# Altium PCB PCB_proc.PcbDoc
Units mm, origin at the board's own origin, x right, y up, seen from the top; angles counter-clockwise.
Board outline 100.96 x 101.6 mm, 2 copper layers (Top Layer, Bottom Layer); 70 components, 38 nets, 282 pads, 0 vias.
Unrouted connection lines stored in the file: 167.
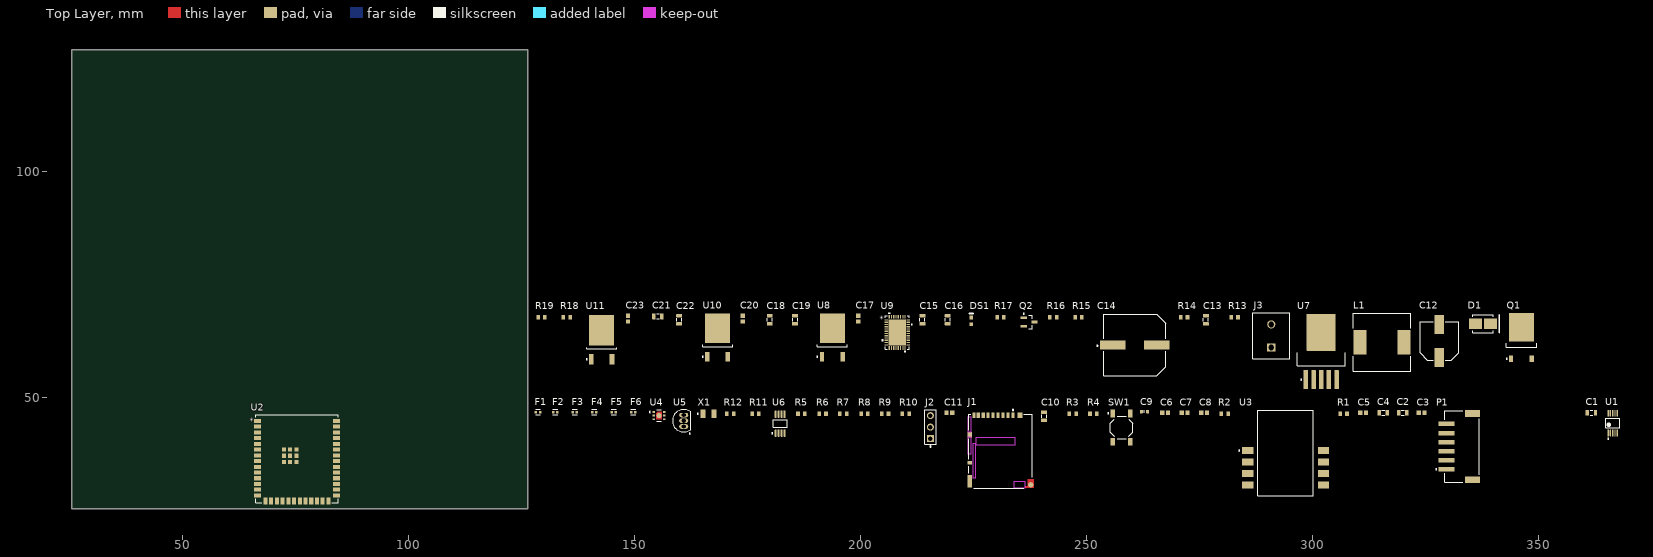
[diagram p0: Top Layer view]
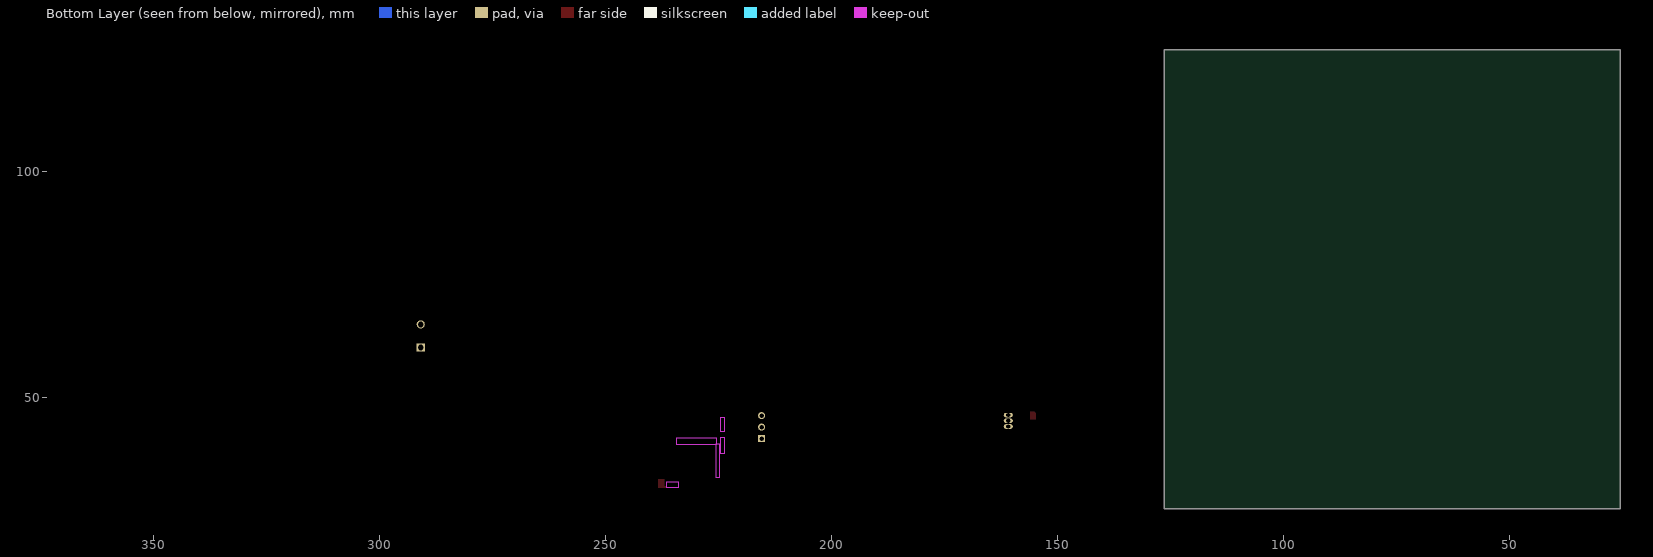
[diagram p1: Bottom Layer view, seen from below]

## Layer stack, top to bottom
Top Solder: solder mask 0.0102, Solder Resist, Dk 3.5
Top Layer: signal copper 0.0356
Dielectric 1: dielectric 0.32, FR-4, Dk 4.8
Bottom Layer: signal copper 0.0356
Bottom Solder: solder mask 0.0102, Solder Resist, Dk 3.5

## Board outline
25.4,25.4 126.365,25.4 126.365,127 25.4,127

## Design rules (kind name [scope] priority, off if disabled: settings)
Clearance [All] p1: gap=0.254 ignorepadtopadclearanceinfootprint=FALSE
PolygonConnect [All] p1: connectstyle=Relief reliefconductorwidth=0.254 reliefentries=4 polygonreliefangle="90 Angle" airgapwidth=0.254
RoomDefinition Supplies [InComponentClass('Supplies')] p1: confinementstyle=ConfineIn formatcopy=TRUE lockcomponents=FALSE outline 127.508,51.435 350.012,51.435 350.012,71.501 127.508,71.501
RoomDefinition Processor [InComponentClass('Processor')] p2: confinementstyle=ConfineIn formatcopy=TRUE lockcomponents=FALSE outline 127.508,26.797 368.554,26.797 368.554,50.165 127.508,50.165
RoutingVias [All] p1: holewidth=0.711 width=1.27 viastyle="Through Hole" minholewidth=0.711 minwidth=1.27 maxholewidth=0.711 maxwidth=1.27
SolderMaskExpansion [All] p1: expansion=0.102 istentingtop=FALSE
Width [All] p1: maxlimit=0.254 minlimit=0.254 preferedwidth=0.254
30 further rules are at their usual default settings.

## Classes and differential pairs
component class Supplies: C12 C13 C14 C15 C16 C17 C18 C19 C20 C21 C22 C23 D1 DS1 J3 L1 Q1 Q2 R13 R14 R15 R16 R17 R18 R19 U7 U8 U9 U10 U11
component class Processor: C1 C2 C3 C4 C5 C6 C7 C8 C9 C10 C11 F1 F2 F3 F4 F5 F6 J1 J2 P1 R1 R2 R3 R4 R5 R6 R7 R8 R9 R10 R11 R12 SW1 U1 U2 U3 U4 U5 U6 X1

## Components (designator, comment, footprint, x,y, rotation, side; value= is the part's Value field where it differs from the comment)
C1 "Capacitor 22µF +/-40% 16V 0805" CAPC0805(2012)145_L 361.823,46.609 r0 top value=22µF
C2 "Capacitor 22µF +/-40% 16V 0805" CAPC0805(2012)145_L 320.04,46.609 r0 top value=22µF
C3 "Capacitor 100 nF +/-10% 50 V 0603" CAPC1608X90X40NL10T20 324.231,46.609 r0 top value=100nF
C4 "Capacitor 22µF +/-40% 16V 0805" CAPC0805(2012)145_L 315.722,46.609 r0 top value=10µF
C5 "Capacitor 100 nF +/-10% 50 V 0603" CAPC1608X90X40NL10T20 311.277,46.609 r0 top value=100nF
C6 "Capacitor 100 nF +/-10% 50 V 0603" CAPC1608X90X40NL10T20 267.462,46.609 r0 top value=1uF
C7 "Capacitor 100 nF +/-10% 50 V 0603" CAPC1608X90X40NL10T20 271.78,46.609 r0 top value=10nF
C8 "Capacitor 100 nF +/-10% 50 V 0603" CAPC1608X90X40NL10T20 276.098,46.609 r0 top value=330nF
C9 "Capacitor 1µF +/-40% 50V 0603" CAPC0603(1608)100_L 262.89,46.863 r0 top value=1µF
C10 "Capacitor 22µF +/-40% 16V 0805" CAPC0805(2012)145_L 240.665,45.847 r90 top value=10µF
C11 "Capacitor 100 nF +/-10% 50 V 0603" CAPC1608X90X40NL10T20 219.71,46.609 r0 top value=100nF
C12 "EEE-FK1E221P" PNSC-EEE-FK1E221P_N 328.168,62.484 r90 top
C13 "Capacitor 22µF +/-40% 16V 0805" CAPC0805(2012)145_L 276.479,67.183 r90 top value=22µF
C14 "EEV-FK1V681Q" FP-FKH13-MFG 260.731,61.595 r0 top
C15 "Capacitor 22µF +/-40% 16V 0805" CAPC0805(2012)145_L 213.741,67.183 r90 top value=10µF
C16 "Capacitor 22µF +/-40% 16V 0805" CAPC0805(2012)145_L 219.329,67.183 r90 top value=10µF
C17 "Capacitor 100 nF +/-10% 50 V 0603" CAPC1608X90X40NL10T20 199.517,67.437 r90 top value=100nF
C18 "Capacitor 22µF +/-40% 16V 0805" CAPC0805(2012)145_L 179.959,67.183 r90 top value=10µF
C19 "Capacitor 22µF +/-40% 16V 0805" CAPC0805(2012)145_L 185.547,67.183 r90 top value=10µF
C20 "Capacitor 100 nF +/-10% 50 V 0603" CAPC1608X90X40NL10T20 173.99,67.437 r90 top value=100nF
C21 "Capacitor 22µF +/-40% 16V 0805" CAPC0805(2012)145_L 155.194,67.945 r0 top value=10µF
C22 "Capacitor 22µF +/-40% 16V 0805" CAPC0805(2012)145_L 159.893,67.183 r90 top value=10µF
C23 "Capacitor 100 nF +/-10% 50 V 0603" CAPC1608X90X40NL10T20 148.59,67.437 r90 top value=100nF
D1 "SS54B" JCET-SMB-2_M 337.82,66.294 r0 top
DS1 "LTW-C191TS5" LTST-LTW-C191TS5_V 224.536,66.929 r90 top
F1 "LESD8D3.3CAT5G" FP-ESDALC5-1BM2-MFG 128.651,46.736 r0 top
F2 "LESD8D3.3CAT5G" FP-ESDALC5-1BM2-MFG 132.461,46.736 r0 top
F3 "LESD8D3.3CAT5G" FP-ESDALC5-1BM2-MFG 136.779,46.736 r0 top
F4 "LESD8D3.3CAT5G" FP-ESDALC5-1BM2-MFG 141.097,46.736 r0 top
F5 "LESD8D3.3CAT5G" FP-ESDALC5-1BM2-MFG 145.415,46.736 r0 top
F6 "LESD8D3.3CAT5G" FP-ESDALC5-1BM2-MFG 149.733,46.736 r0 top
J1 "DM3AT-SF-PEJM5" FP-DM3AT-SF-PEJM5-MFG 231.013,38.1 r0 top
J2 "90120-0123" FP-90120-0123-MFG 215.519,43.434 r90 top
J3 "1729128" PHOE-1729128-2_V 290.957,63.627 r90 top
L1 "SRR1280-330M" FP-SRR1280-MFG 315.468,62.23 r0 top
P1 "S6B-PH-SM4-TB(LF)(SN)" JST-S6B-PH-SM4-TB(LF)(SN)_V 332.613,39.116 r90 top
Q1 "IPD068P03L3 G" INF-PG-TO252-3-1_L 346.329,63.246 r90 top
Q2 "2N7002" INF-PG-SOT23_M 237.363,66.675 r0 top
R1 "Resistor 10k +/-1% 0603 100 mW" RESC1608X55X25ML10T15 306.959,46.355 r0 top value=10k
R2 "Resistor 10k +/-1% 0603 100 mW" RESC1608X55X25ML10T15 280.67,46.355 r0 top value=10k
R3 "Resistor 10k +/-1% 0603 100 mW" RESC1608X55X25ML10T15 247.015,46.355 r0 top value=10k
R4 "Resistor 10k +/-1% 0603 100 mW" RESC1608X55X25ML10T15 251.587,46.355 r0 top value=10k
R5 "Resistor 10k +/-1% 0603 100 mW" RESC1608X55X25ML10T15 186.944,46.355 r0 top value=10k
R6 "Resistor 10k +/-1% 0603 100 mW" RESC1608X55X25ML10T15 191.643,46.355 r0 top value=10k
R7 "Resistor 10k +/-1% 0603 100 mW" RESC1608X55X25ML10T15 196.215,46.355 r0 top value=10k
R8 "Resistor 10k +/-1% 0603 100 mW" RESC1608X55X25ML10T15 200.914,46.355 r0 top value=10k
R9 "Resistor 10k +/-1% 0603 100 mW" RESC1608X55X25ML10T15 205.486,46.355 r0 top value=10k
R10 "Resistor 10k +/-1% 0603 100 mW" RESC1608X55X25ML10T15 210.058,46.355 r0 top value=10k
R11 "Resistor 10k +/-1% 0603 100 mW" RESC1608X55X25ML10T15 176.784,46.355 r0 top value=0
R12 "Resistor 10k +/-1% 0603 100 mW" RESC1608X55X25ML10T15 171.196,46.355 r0 top value=0
R13 "Resistor 10k +/-1% 0603 100 mW" RESC1608X55X25ML10T15 282.829,67.691 r0 top value=10k
R14 "Resistor 10k +/-1% 0603 100 mW" RESC1608X55X25ML10T15 271.653,67.691 r0 top value=10k
R15 "Resistor 10k +/-1% 0603 100 mW" RESC1608X55X25ML10T15 248.285,67.691 r0 top value=47
R16 "Resistor 10k +/-1% 0603 100 mW" RESC1608X55X25ML10T15 242.697,67.691 r0 top value=47
R17 "Resistor 10k +/-1% 0603 100 mW" RESC1608X55X25ML10T15 231.013,67.691 r0 top value=10k
R18 "Resistor 10k +/-1% 0603 100 mW" RESC1608X55X25ML10T15 135.001,67.691 r0 top value=120
R19 "Resistor 10k +/-1% 0603 100 mW" RESC1608X55X25ML10T15 129.413,67.691 r0 top value=169
SW1 "TL3342F160QG" ESWI-TL3342F160QG_V 257.81,43.307 r0 top
U1 "ADS1015IDGST" FP-DGS0010A-MFG 366.522,44.323 r90 top
U2 "ESP32-S3-WROOM-1U-N8R2" ESP32­S3­WROOM­1U_EXP 75.286,36.396 r0 top
U3 "MP3V5004DP" Freescale_Semiconductor_SOT1693-1_MFG 294.132,34.417 r0 top
U4 "SGP40-D-R4" FP-SGP40-D-R4-MFG 155.448,45.974 r0 top
U5 "DS18B20+" Q3+1 160.909,44.831 r0 top
U6 "DS1338U-18" U8-1_N 182.245,44.196 r90 top
U7 "LM2576S-12/NOPB" KTT0005B_N 302.006,60.198 r90 top
U8 "LD1117DT50CTR" TO-252_N 193.802,63.246 r90 top
U9 "DRV8316CTRGFR" VQFN40_RGF_TEX 208.153,64.389 r0 top
U10 "LD1117DT33TR" TO-252_N 168.402,63.246 r90 top
U11 "LD1117DTC-R" TO-252_M 142.748,62.738 r90 top
X1 "ABS07-32.768KHz-T" ABRA-ABS07-2_V 166.37,46.355 r0 top

## Footprints (in the part's own frame and the unit in brackets; to place one, negate y for a bottom-side part, rotate by r counter-clockwise, add the part's x,y. Pads: shape width x height; smd on the part's side, far side on the other; paste and mask are expansions set on the pad)
ABRA-ABS07-2_V [mm] "SMD, 2-Leads, Body 3.2x1.5mm"
  rect 1.1x1.9 smd: 1(-1.25,0) 2(1.25,0)
  silkscreen extent -2.47,-0.12 -2.22,0.12, body extent -1.6,-0.75 1.6,0.75, height 0.9
CAPC0603(1608)100_L [mm] "Chip Capacitor, Body 1.6x0.8mm, Height 1.0mm, IPC High Density"
  rrect25% 0.66x0.76 smd: 1(-0.7,0) 2(0.7,0)
  silkscreen extent 0,-0.3 0,0.3, body extent -0.8,-0.4 0.8,0.4, height 0.95
CAPC0805(2012)145_L [mm] "Chip Capacitor, Body 2.0x1.2mm, Height 1.45mm, IPC High Density"
  rrect25% 0.76x1.3 smd: 1(-0.9,0) 2(0.89,0)
  silkscreen extent -0.3,-0.55 0.3,0.55, body extent -1,-0.6 1,0.6, height 1.45
CAPC1608X90X40NL10T20 [mm] "Chip Capacitor, 2-Leads, Body 1.70x0.90mm, IPC Medium Density"
  rect 0.95x0.95 smd: 1(-0.625,0) 2(0.625,0)
  body extent -0.85,-0.45 0.85,0.45, height 0.9
ESP32­S3­WROOM­1U_EXP [mil]
  rect 59x35 smd paste+0 mask+0: 1(-344.5,331.1) 2(-344.5,281.1) 3(-344.5,231.1) 4(-344.5,181.1) 5(-344.5,131.1) 6(-344.5,81.1) 7(-344.5,31.1) 8(-344.5,-18.9) 9(-344.5,-68.9) 10(-344.5,-118.9) 11(-344.5,-168.9) 12(-344.5,-218.9) 13(-344.5,-268.9) 14(-344.5,-318.9) 27(344.5,-318.9) 28(344.5,-268.9) 29(344.5,-218.9) 30(344.5,-168.9) 31(344.5,-118.9) 32(344.5,-68.9) 33(344.5,-18.9) 34(344.5,31.1) 35(344.5,81.1) 36(344.5,131.1) 37(344.5,181.1) 38(344.5,231.1) 39(344.5,281.1) 40(344.5,331.1)
  rect 35x59 smd paste+0 mask+0: 15(-275,-368.1) 16(-225,-368.1) 17(-175,-368.1) 18(-125,-368.1) 19(-75,-368.1) 20(-25,-368.1) 21(25,-368.1) 22(75,-368.1) 23(125,-368.1) 24(175,-368.1) 25(225,-368.1) 26(275,-368.1)
  rect 35x35 smd paste+0 mask+0: 41(-59.1,27.2) 42(-59.1,82.3) 43(-114.2,82.3) 44(-114.2,27.2) 45(-114.2,-27.9) 46(-59.1,-27.9) 47(-4,-27.9) 48(-4,27.2) 49(-4,82.3)
  silkscreen extent -360,-383 360,383
ESWI-TL3342F160QG_V [mm] "SMD, 4-Leads, Body 5x5mm, Pitch 6.3mm"
  rect 1x1.7 smd: 1(-1.9,3.15) 2(-1.9,-3.15) 3(1.9,3.15) 4(1.9,-3.15)
  silkscreen extent -3.07,-2.5 2.5,3.27, body extent -2.5,-2.5 2.5,2.5, height 1.5
FP-90120-0123-MFG [mm]
  rect 1.55x1.55 hole 1 paste-2539.97 mask+0: 1(-2.54,0)
  round 1.55 hole 1 paste-2539.97 mask+0: 2(0,0) 3(2.54,0)
  silkscreen extent -4.42,-1.27 3.81,1.27, body extent -3.91,-1.37 3.91,1.37, height 0.25
FP-DGS0010A-MFG [mm]
  rrect33% 1.45x0.3 smd paste+0 mask+0: 1(-2.2,1) 2(-2.2,0.5) 3(-2.2,0) 4(-2.2,-0.5) 5(-2.2,-1) 6(2.2,-1) 7(2.2,-0.5) 8(2.2,0) 9(2.2,0.5) 10(2.2,1)
  silkscreen extent -3.6,-1.55 1.05,1.55, body extent -3.03,-1.8 3.03,1.8, height 0.25
FP-DM3AT-SF-PEJM5-MFG [mm]
  rect 0.7x1.2 smd paste+0 mask+0: 1(2.775,7.975) 2(1.675,7.975) 3(0.575,7.975) 4(-0.525,7.975) 5(-1.625,7.975) 6(-2.725,7.975) 7(-3.825,7.975) 8(-4.925,7.975) 9(-5.875,7.975)
  rect 1x0.8 smd paste+0 mask+0: 10(-6.825,-2.525)
  rect 1x1.2 smd paste+0 mask+0: 11(4.325,7.975) 12(-6.825,3.675)
  rect 1x2.8 smd paste+0 mask+0: 13(-6.825,-6.675)
  round 1.145 smd paste+0 mask+0: 14(6.689,-7.439)
  Top Layer region: 6.025,-6.175 7.325,-6.175 7.325,-8.075 5.475,-8.075 5.475,-7.725 5.875,-7.725 6.025,-7.575 6.025,-6.175
  Keep-Out Layer region: 2.925,-8.075 5.475,-8.075 5.475,-6.725 2.925,-6.725
  Keep-Out Layer region: -7.225,-0.525 -6.475,-0.525 -6.475,3.075 -7.225,3.075
  Keep-Out Layer region: -7.225,4.275 -6.475,4.275 -6.475,7.525 -7.225,7.525
  Keep-Out Layer region: -6.125,-5.925 -5.425,-5.925 -5.425,1.675 -6.125,1.675
  Keep-Out Layer region: -5.425,1.375 3.275,1.375 3.275,2.975 -5.425,2.975
  silkscreen extent -7.02,-8.18 7.02,9.25, body extent -7.42,-8.27 7.42,8.67, height 0.25
FP-ESDALC5-1BM2-MFG [mm]
  rect 0.55x0.5 smd paste+0 mask+0: 1(-0.475,0) 2(0.475,0)
  silkscreen extent -0.53,-0.63 0.53,0.63, body extent -0.85,-0.43 0.85,0.43, height 0.25
FP-FKH13-MFG [mm]
  rect 5.7x2 smd paste+0 mask+0: 1(-4.85,0) 2(4.85,0)
  silkscreen extent -8.37,-6.85 6.85,6.85, body extent -7.95,-7.1 7.95,7.1, height 0.25
FP-SGP40-D-R4-MFG [mm]
  rect 0.55x0.4 smd paste+0 mask+0: 1(-1.15,0.8) 2(-1.15,0) 3(-1.15,-0.8) 4(1.15,-0.8) 5(1.15,0) 6(1.15,0.8)
  round 1.125 smd paste-1000 mask+0: 7(0,0)
  Top Layer region: -0.625,-0.85 0.625,-0.85 0.625,0.85 -0.325,0.85 -0.625,0.55 -0.625,-0.85
  silkscreen extent -2.17,-1.27 0.5,1.27, body extent -1.53,-1.37 1.53,1.37, height 0.25
FP-SRR1280-MFG [mm]
  rect 2.9x5.4 smd paste+0 mask+0: 1(-4.85,0) 2(4.85,0)
  silkscreen extent -6.4,-6.4 6.4,6.4, body extent -6.5,-6.5 6.5,6.5, height 0.25
Freescale_Semiconductor_SOT1693-1_MFG [mil]
  rect 100x60 smd paste+0 mask+0: 1(-330,150) 2(-330,50) 3(-330,-50) 4(-330,-150) 5(330,-150) 6(330,-50) 7(330,50) 8(330,150)
  silkscreen extent -410,-242 242,502, body extent -384,-252 384,506, height 10
INF-PG-SOT23_M [mm] "SOT23, 3-Leads, Body 2.9x1.3mm, Pitch 0.95mm, IPC Low Density"
  rect 1.35x0.6 smd: 1(-1.2,0.95) 2(-1.2,-0.95) 3(1.2,0)
  silkscreen extent -1.32,-1.5 0.7,1.92, body extent -0.7,-1.5 0.7,1.5, height 1.1
INF-PG-TO252-3-1_L [mm] "DPAK, 3-Leads, Body 6.525x6.12mm, Pitch 2.28mm, IPC High Density"
  rect 1.45x0.9 smd: 1(-4.7,2.28) 3(-4.7,-2.28)
  rect 6.3x5.55 smd: 2(2.3,0)
  silkscreen extent -4.82,-3.35 -1.25,3.4, body extent -2.15,-3.32 4.07,3.32, height 2.35
JCET-SMB-2_M [mm] "Molded Diode, 2-Leads, Body 4.57x3.94mm"
  rect 2.85x2.25 smd: 1(-1.675,0) 2(1.675,0)
  silkscreen extent -2.3,-2 3.6,2, body extent -2.5,-1.97 2.5,1.97, height 2.44
JST-S6B-PH-SM4-TB(LF)(SN)_V [mm] "SMD, 2-Leads, Body 15.9x7.6mm, Pitch 2mm"
  rect 1x3.5 smd: 1(-5,2.875) 2(-3,2.875) 3(-1,2.875) 4(1,2.875) 5(3,2.875) 6(5,2.875)
  rect 1.5x3.4 smd: MP1(-7.35,-2.875) MP2(7.35,-2.875)
  silkscreen extent -7.95,-4.37 7.95,5.3, body extent -7.95,-4.37 7.95,4.23, height 5.6
KTT0005B_N [mm] "DPAK, 5-Leads, Body 10.65x9.65mm, Pitch 1.7mm, IPC Medium Density"
  rrect10% 4.15x1 smd: 1(-6.25,3.4) 2(-6.25,1.7) 3(-6.25,0) 4(-6.25,-1.7) 5(-6.25,-3.4)
  rrect2% 8.2x6.4 smd: 6(4.2,0)
  silkscreen extent -6.37,-5.35 -0.3,5.35, body extent -3.15,-5.32 6.5,5.33, height 4.83
LTST-LTW-C191TS5_V [mm] "SMD, 2-Leads, Body 1.6x0.8mm"
  rect 0.8x0.8 smd: 1(-0.75,0) 2(0.75,0)
  silkscreen extent 1.65,-0.4 1.65,0.4, body extent -0.8,-0.4 0.8,0.4, height 0.65
PHOE-1729128-2_V [mm] "Receptacle, 2-Leads, Body 8.1x10.16mm, Pitch 5.08mm"
  rect 1.8x1.8 hole 1.3: 1(-2.54,0)
  round 1.8 hole 1.3: 2(2.54,0)
  silkscreen extent -5.08,-4.05 5.08,4.05, body extent -5.65,-4.05 5.08,4.05, height 10.01
PNSC-EEE-FK1E221P_N [mm] "CAPAE, 2-Leads, Body 8.5x8.5mm, IPC Medium Density"
  rect 4.2x2.1 smd: 1(-3.675,0) 2(3.675,0)
  silkscreen extent -4.25,-4.25 4.25,4.25, body extent -5,-4.25 5,4.25, height 10.5
Q3+1 [mm] "TO, Flat Index; 3 In-Line, Axial Leads; Body Dia. 4.7mm; Leads 0.56 x 0.51 mm (max)"
  oval 2x1 hole 0.9: 1(0,-1.27) 2(0,0) 3(0,1.27)
  silkscreen extent -2.48,-2.95 1.5,2.48, body extent -2.48,-2.5 1.5,2.5, height 4.96
RESC1608X55X25ML10T15 [mm] "Chip Resistor, 2-Leads, Body 1.70x0.90mm, IPC Low Density"
  rect 0.8x1 smd: 1(-0.75,0) 2(0.75,0)
  body extent -0.85,-0.45 0.85,0.45, height 0.55
TO-252_M [mm] "D-PAK, 4-Leads, Body 6.1x6.5mm, Pitch 2.28mm, Lead Span 9.7mm, IPC Low Density"
  rect 2.4x1 smd: 1(-4.3,2.28) 3(-4.3,-2.28)
  rect 6.8x5.55 smd: 4(2.1,0)
  silkscreen extent -4.42,-3.3 -1.7,3.45, body extent -1.95,-3.3 4.25,3.3, height 2.4
TO-252_N [mm] "D-PAK, 4-Leads, Body 6.1x6.5mm, Pitch 2.28mm, Lead Span 9.7mm, IPC Medium Density"
  rect 2.1x0.95 smd: 1(-4.25,2.28) 3(-4.25,-2.28)
  rect 6.5x5.5 smd: 4(2.05,0)
  silkscreen extent -4.37,-3.3 -1.6,3.43, body extent -2,-3.3 4.2,3.3, height 2.4
U8-1_N [mm] "TSOP, 8-Leads, Body 3x3mm, Pitch 0.65mm, IPC Medium Density"
  oval 1.7x0.45 smd: 1(-2.1,0.975) 2(-2.1,0.325) 3(-2.1,-0.325) 4(-2.1,-0.975) 5(2.1,-0.975) 6(2.1,-0.325) 7(2.1,0.325) 8(2.1,0.975)
  silkscreen extent -2.22,-1.55 0.85,1.87, body extent -1.55,-1.55 1.55,1.55, height 1.1
VQFN40_RGF_TEX [mil]
  rect 32x10 smd paste+0 mask+0: 1(-96.5,108.3) 2(-96.5,88.61) 3(-96.5,68.91) 4(-96.5,49.22) 5(-96.5,29.53) 6(-96.5,9.84) 7(-96.5,-9.84) 8(-96.5,-29.53) 9(-96.5,-49.22) 10(-96.5,-68.91) 11(-96.5,-88.61) 12(-96.5,-108.3) 21(96.5,-108.3) 22(96.5,-88.61) 23(96.5,-68.91) 24(96.5,-49.22) 25(96.5,-29.53) 26(96.5,-9.84) 27(96.5,9.84) 28(96.5,29.53) 29(96.5,49.22) 30(96.5,68.91) 31(96.5,88.61) 32(96.5,108.3)
  rect 10x32 smd paste+0 mask+0: 13(-68.91,-136) 14(-49.23,-136) 15(-29.53,-136) 16(-9.85,-136) 17(9.84,-136) 18(29.53,-136) 19(49.23,-136) 20(68.92,-136) 33(68.92,136) 34(49.23,136) 35(29.53,136) 36(9.84,136) 37(-9.85,136) 38(-29.53,136) 39(-49.23,136) 40(-68.91,136)
  rect 150x228 smd paste-113.5 mask+0: 41(0,0)
  silkscreen extent -132,-172 132,172, body extent -101,-140 101,140, height 39

## Part data
C1 C2 C4 C10 C13 C15 C16 C18 C19 C21 C22: library part CMP-001-00081-4, "Chip Capacitor, 22µF +/-40%, 16V, 0805, Thickness 1.45 mm", Case/Package=0805, Max Operating Temperature=85°C, Min Operating Temperature=-55°C, Tolerance=5%, Voltage Rating=16V, Mounting Technology=SMT, Pins=2
C3 C5 C6 C7 C8 C11 C17 C20 C23: library part CMP-001-00017-6, "Chip Capacitor, 100 nF, +/- 10%, 50 V, 0603 (1608 Metric)", Capacitor Type=Ceramic, Case/Package=0603, Max Operating Temperature=125°C, Min Operating Temperature=-55°C, Tolerance=10%, Voltage Rating=50V, Mounting Technology=SM, Pins=2, RoHS Compliant=True
C9: library part CMP-001-00078-4, "Chip Capacitor, 1µF +/-40%, 50V, 0603, Thickness 1 mm", Case/Package=0603, Max Operating Temperature=85°C, Min Operating Temperature=-55°C, Tolerance=10%, Voltage Rating=50V, Mounting Technology=SMT, Pins=2
C12: library part CMP-1665-00017-3, "Aluminum Electrolytic Capacitor, 220 uF, +/- 20%, 25 V, -55 to 105 degC, 2-Pin CAPAE, RoHS, Tape and Reel", Manufacturer=Panasonic, Max Operating Temperature="105 degC", Min Operating Temperature="-55 degC", Package Quantity=500, Voltage Rating="25 V", ComponentLink1Description="Manufacturer URL", ComponentLink1URL=http://www.panasonic.com/, ComponentLink2Description=Datasheet, ComponentLink2URL=http://industrial.panasonic.com/cdbs/www-data/pdf/RDE0000/ABA0000C1181.pdf, DatasheetVersion=03/2016, Height="10.2 mm", Lead Pitch="3.1 mm", Length="10.2 mm", Mount="Surface Mount", Mounting Technology="Surface Mount", PackageDescription="2-Pin Electrolytic Aluminum Capacitor, Body 8.3 x 8.3 mm", PackageReference=EEE-FK1E221P, Packaging="Tape and Reel", Pins=2, REACH SVHC="No SVHC", RoHSCompliant=true
C14: library part CMP-05427-002172-1, "CAP ALUM 680UF 20% 35V SMD", Capacitance=680uF, Case/Package=Radial, ESR (Equivalent Series Resistance)=60mR, Leakage Current=3uA, Max Operating Temperature=105°C, Min Operating Temperature=-55°C, Package Quantity=200, Ratings=AEC-Q200, Ripple Current=1.1A, Tolerance=20%, Voltage=35V, Construction=Cylindrical, Contact Plating=Tin, Diameter=12.5mm, Height=13.5mm, Height - Seated (Max)=0.531inch, Impedance=60mR, Lead Free="Lead Free", Length=14mm, Life (Hours)=5000Hour, Material=Aluminium, Mount="Surface Mount", Packaging="Tape and Reel", Radiation Hardening=No, Reach SVHC Compliant=Yes, Ripple Current (AC)=1.1A, RoHS Compliant=Yes, Series=FK, Termination=SMD/SMT, Voltage Rating=35V, Voltage Rating (DC)=35V, Width=900um
D1: library part CMP-2100-03685-1, "Schottky Barrier Rectifier, 40 V, 5 A, -55 to 150 degC, 2-Pin SMD", Manufacturer=JCET, Package Description="2-Pin Surface Mount Device, Body 4.315 x 3.62 mm", Package Reference=SMB-2, Datasheet URL=http://wiki.seeedstudio.com/images/3/3f/0310130P1.pdf, Datasheet Version=41395.0, Manufacturer URL=http://www.cj-elec.com/
DS1: library part CMP-007-00027-2, "LED Uni-Color White, 70 mW, 20 mA, -20 to 80 degC, 2-Pin SMD, RoHS, Tape and Reel", Case/Package=0603, Colour=White, Forward Current=5mA, Forward Voltage=3.15V, Manufacturer=Lite-On, Max Operating Temperature=80°C, Min Operating Temperature=-20°C, Package Description="2-Pin Surface Mount Device, Body 1.6 x 0.8 mm", Package Quantity=1, Power=70mW, Datasheet URL=http://optoelectronics.liteon.com/upload/download/DS22-2004-201/S_110_LTW-C191TS5.pdf, Datasheet Version="Rev. B, 06/2010", Illumination Colour=White, Lens Style=Diffused, Luminous Intensity=28mcd, Manufacturer URL=http://www.us.liteon.com/, Mounting Technology=SM, Nominal Vf=2.93V, Package Reference=LTW-C191TS5, Packaging=TapeandReel, Pins=2, RoHS Compliant=True, Viewing Angle=130degrees
F1 F2 F3 F4 F5 F6: library part CMP-00355-46355615-1, "ESDALC5-1BM2 ESD Suppressors / TVS Diodes Single Line Transil Vbr 5V min 26pF 0", Breakdown Voltage=5V, Capacitance=26pF, Clamping Voltage=17.5V, Leakage Current=50nA, Max Breakdown Voltage=8V, Max Operating Temperature=150°C, Max Power Dissipation=150W, Max Reverse Leakage Current=60nA, Min Operating Temperature=-55°C, Peak Pulse Current=9A, Power Line Protection=No, Composition=Zener, Depth=600µm, Direction=Bidirectional, Element Configuration=Single, ESD Protection=Yes, Height=450µm, Lead Free="Lead Free", Length=1mm, Lifecycle Status=Production, Max Repetitive Reverse Voltage (Vrrm)=5V, Min Breakdown Voltage=5V, Mount="Surface Mount", NexarPartId=46355615, Number of Bidirectional Channels=1, Number of Channels=1, Number of Pins=2, Packaging="Tape and Reel", Peak Pulse Power=150W, Polarity=Bidirectional, Radiation Hardening=No, REACH SVHC="No SVHC", Reverse Standoff Voltage=5V, RoHS=Compliant, Schedule B="8536300000, 8536300000", Termination=SMD/SMT, Width=650µm
J1: library part CMP-2000-05150-2, "CONN MICRO SD CARD PUSH-PUSH R/A", Current Rating=500mA, Flammability Rating="UL94 V-0", Max Operating Temperature=85°C, Max Voltage Rating (AC)=125V, Min Operating Temperature=-25°C, Package Quantity=1, Connector Type=Connector, Contact Material="Copper Alloy", Contact Plating=Gold, Depth=15.95mm, Gender=Female, Height=1.68mm, Housing Material=Polymer, Lead Free="Lead Free", Length=15.95mm, Max Current Rating=500mA, Mount="Surface Mount", Number of Contacts=8, Number of Positions=8, Number of Rows=1, Orientation="Right Angle", Packaging="Tape and Reel", Pitch=1.1mm, Radiation Hardening=No, REACH SVHC="No SVHC", Termination=SMD/SMT, Voltage Rating=125V, Width=13.85mm
J2: library part CMP-04776-000237-1, "CONN HEADER VERT 3POS 2.54MM", Color=Black, Contact Resistance=20mR, Current Rating=3A, Max Operating Temperature=125°C, Max Voltage Rating (DC)=350.35kV, Min Operating Temperature=-55°C, Voltage Rating=350V, Contact Gender=Male, Contact Material=Brass, Contact Mating Length=6.75mm, Contact Plating=Tin, Contact Post Length=2.9mm, Gender=Male, Glow Wire Compliant=Non-compliant, Housing Color=Black, Housing Material=Polyester, Lead Free="Lead Free", Mount="Through Hole", Number of Circuits=3, Number of Contacts=3, Number of Positions=3, Number of Rows=1, Orientation=Vertical, Packaging=Tray, Pitch=2.54mm, Radiation Hardening=No, REACH SVHC="No SVHC", RoHS Compliant=Yes, Series=90120, Termination=Solder, Voltage Rating (AC)=350V
J3: library part CMP-2000-05815-1, "PCB Terminal Block, 13.5 A, 400 V, 2-Pin THD, RoHS, Bulk", Current Rating=13500mA, Manufacturer="Phoenix Contact", Package Description="2-Pin Through Hole Device, Body 8.1 x 10.16 mm, Pitch 5.08 mm", Package Reference=1729128-2, Package Version=03/2015, Voltage Rating=400V, Datasheet URL=https://datasheet.ciiva.com/16046/1729128-16046181.pdf, Datasheet Version=12/2013, Manufacturer URL=http://www.phoenixcontact.com/, Mounting Technology=ThroughHole, No. of Positions=2, No. of Rows=1, Orientation=Horizontal, Package URL=https://www.phoenixcontact.com/online/portal/pi/pxc/product_detail_page/!ut/p/b1/3VdJjqNKFDxLH8AFycySyWY2ozFsEPOMMQaDOX1XedGL_1Vdm5YXJleknhSKeBkvI6EA8ncAo3AYoDhBQGco6KN7VURTdemj9us_IEKEZo_YHiPAEWEFmDGOHMORkqKYCORBZxgL7ZoaZYcbFFUZ3fqxSY6GOuxydWUuHqz1ynmMFygu583Bob0Ewr6Sd_l-5m-kAueHiB0jpRwZwe58wwtkpxtMYd_LmGcDRU02dRNEyWt6Y2ti5pSyJ_reIkzIulrqApdnbT11V5jnCKbYNCvhEM1MCpPByat_X379-iThf08CI5GfOPqfBeS3BRoBOdD55AKVv0iLwCMq-2BrzXWSGRH7pUGD9uwXQjiph3xL0DKQwdGa0JImiIOmBNOestqgwTHSSs2oOep-78apyXQBvNi8ZLaFjvjWvcaUEBu0MC6Wbe-d6mB0FAebo2lUWinqYaZs5DAYzV0RP9yitUjnGJ0iI9xhZkT42OCQNUJJhkgWINNQLP2JFP6OpMg3JCVg70jqHT0lvKOnhHf0lPuOnnLf0VPuWx6_dxwUIvwk5WMkT0kLL1mh61l2yZVSzG3pYV_bqo-mj6uMKwKwdnnW8Jh5RTOJzMOA5c-eJDaZQw4mTMPH02PvS_ZAqNVjVTo2WyYLkwH_KU1mmmG5kjRhDqPXLwwVHvVOjCM60-fpXvTDfMGW1PVFVS1r4e4yVDk4ZdNbkUHvqPqQSeian4UD39fNKmachqdJ1NJbyk8rXT9mXTvPk3oE5meulKGgiruPJek-4I9hTT6G8ZLOyRSm2RRVbThERQad5OS28hdt4YW4vG0stgYYzsWsK4_7y6DZMjJSCqri1kyiZR5vD7pwIrNR7QwPHTcLTI5qT7eRlpHrdGiupYlqQDJ7zy_CND8fWWBoLRXxk1RVcXiBQwbTD4Xi7KL-FuO94t9xaqweXzH, Packing=Bulk, PartNumber=1729128, Pitch=5.08mm, RoHS=TRUE
L1: library part CMP-2000-07148-2, "FIXED IND 33UH 3.5A 57 MOHM SMD", Case/Package=Nonstandard, Current Rating=3.5A, DC Resistance (DCR)=57mR, Frequency=9.5MHz, Inductance=33uH, Inductance Tolerance=20%, Max Operating Temperature=125°C, Min Operating Temperature=-40°C, Package Quantity=400, Resistance=57MR, Resistor Type=Wirewound, Saturation Current=3.3A, Test Frequency=100kHz, Core Material=Ferrite, DC Current=3.5A, Depth=12.8mm, Height=7.5mm, Height - Seated (Max)=0.315inch, Length=12.5mm, Material=Steel, Max DC Current=3.5A, Military Standard=Not, Mount="Surface Mount", Number of Pins=2, Packaging="Tape and Reel", Q Factor=28, Radiation Hardening=No, REACH SVHC="No SVHC", RMS Current (Irms)=3.5A, RoHS Compliant=Yes, Sample Rate (Hz)=100kHz, Self Resonant Frequency=9.5MHz, Series=SRR1280, Shielding=Shielded, Termination=SMD/SMT, Tolerance=20%, Width=12.5mm
P1: library part CMP-2000-07027-1, "Male Header, Pitch 2 mm, 1 x 6 Position, Height 5.5 mm, -25 to 85 degC", Manufacturer=JST, Package Description="Male Header, Pitch 2 mm, 1 x 6 Position, Height 5.5 mm", Datasheet URL=https://datasheet.ciiva.com/11747/0900766b80df0d9d-11747278.pdf, Datasheet Version=11/2008, Manufacturer URL=http://www.jst.com/home2.html, Mounting Technology=SurfaceMount, No of Positions=6, Package Reference=S6B-PH-SM4-TB(LF)(SN), Pitch=2mm, Style/Orientation=RightAngleHeader/Plug, Termination=Solder, Type=ShroudedHeader
Q1: library part CMP-1099-00059-1, "P-Channel OptiMOS P3 Power-Transistor, -30 V VDS, -70 A ID, -55 to 175 degC, PG-TO252-3-1, Reel, Green", Manufacturer=Infineon, ComponentLink1Description="Manufacturer URL", ComponentLink1URL=http://www.infineon.com/, ComponentLink2Description=Datasheet, ComponentLink2URL=http://www.infineon.com/dgdl/IPD068P03L3+G_2+0.pdf?folderId=db3a304314dca38901154a7313d21a66&fileId=db3a30432313ff5e01232cc234f07d94, ComponentLink3Description="Package Specification", ComponentLink3URL=http://www.infineon.com/dgdl/TLE42744_DS_11.pdf?folderId=db3a304318f3fe290118f5a433570040&fileId=db3a304327b897500128012ccafe37d2&sId=db3a30443d67b5ca013d83f7c0ea327b, DatasheetVersion="Rev. 2.0", Green=TRUE, ID (max)="-70Â A", IDpuls (max)="-280Â A", Mounting Technology="Surface Mount", PackageDescription="3-Pin Plastic (Green) Transistor Single Outline Package, 6.5 x 6.12 mm Body, 2.28 mm Pitch", PackageReference=PG-TO252-3-1, PackageVersion=Jan-10, Packing=Reel, PartNumber="IPD068P03L3 G", Pto t (max)="100Â W", QG="68Â nC", RDS (on) (max)="6.8Â mOhm", RDS (on) (max) (@4.5V)="11Â mOhm", Rth="1.5Â K/W", RthJC (max)="1.5 K/W", VDS (max)="-30Â V", VGS(th) (max)="-2Â V", VGS(th) (min)="-1Â V"
Q2: library part CMP-1149-00026-1, "N-Channel OptiMOS Small-Signal-Transistor, 60 V VDS, 0.3 A ID, -55 to 150 degC, PG-SOT23, Reel, Green", Manufacturer=Infineon, ComponentLink1Description="Manufacturer URL", ComponentLink1URL=http://www.infineon.com/, ComponentLink2Description=Datasheet, ComponentLink2URL=http://www.infineon.com/dgdl/2N7002_Rev2.4.pdf?folderId=db3a3043156fd573011622e10b5c1f67&fileId=db3a304319bc939a0119c2a9461e79e6, ComponentLink3Description="Package Specification", ComponentLink3URL=http://www.infineon.com/dgdl/SOT23-Package_Overview.pdf?folderId=db3a30431936bc4b0119532290053c66&fileId=db3a30431936bc4b0119533468123c85, DatasheetVersion="Rev. 2.4", Green=TRUE, Halogen-free=TRUE, ID (max)="0.3Â A", IDpuls (max)="1.2Â A", Mounting Technology="Surface Mount", PackageDescription="3-Pin Small Outline Transistor Package, 2.9 x 1.3 mm Body, 0.95 mm Pitch", PackageReference=PG-SOT23, PackageVersion=Apr-08, Packing=Reel, PartNumber=2N7002, Ptot (max)="0.5Â W", QG="0.4Â nC", RDS (on) (max)="3,000 mOhm", RDS (on) (max) (@4.5V)="4,000 mOhm", RthJA (max)="250 K/W", VDS (max)="60 V", VGS(th) (max)="2.5Â V", VGS(th) (min)="1.5Â V"
R1 R2 R3 R4 R5 R6 R7 R8 R9 R10 R11 R12 R13 R14 R15 R16 R17 R18 R19: library part CMP-009-00017-5, "Chip Resistor, 10 KOhm, +/- 1%, 01 W, -55 to 155 degC, 0603 (1608 Metric)", Case/Package=0603, Max Operating Temperature=155°C, Min Operating Temperature=-55°C, Power=100mW, Tolerance=1%, Voltage Rating=50V, Mounting Technology=SM, Pins=2, RoHS Compliant=True
SW1: library part CMP-011-00008-2, "Tactile Switch, SPST-NO, 50 mA, 12 V, 4-Pin SMD, RoHS, Tape and Reel", Current Rating=50mA, Manufacturer=E-Switch, Max Voltage Rating (DC)=12V, Operating Force=1.6N, Package Description="4-Pin Surface Mount Device, Body 5 x 5 mm, Pitch 6.3 mm", Package Quantity=3000, Case/Package=TL3342F160QG, Contact Material=Silver, Contact Plating=Silver, Datasheet URL=http://spec_sheets.e-switch.com/specs/P010632.pdf, Datasheet Version="Rev. I, 12/2010", Manufacturer URL=http://www.e-switch.ch/en/, Mounting Technology=SM, Package Reference=TL3342F160QG, Packaging=TapeandReel, RoHS Compliant=True, Throw Configuration=SPST, Voltage Rating (DC)=12V
U1: library part CMP-0003-00377-3, "IC ADC 12BIT SIGMA-DELTA 10VSSOP", Case/Package=VSSOP, Max Operating Temperature=125°C, Max Power Dissipation=900uW, Max Supply Voltage=5.5V, Min Operating Temperature=-40°C, Min Supply Voltage=2V, Nominal Supply Current=150uA, Operating Supply Voltage=3.3V, Package Quantity=250, Contact Plating=Gold, Conversion Rate=3300S/s, Height=1.02mm, Integral Nonlinearity (INL)=0.5LSB, Interface=I2C, Lead Free="Lead Free", Length=3mm, Max Supply Voltage (DC)=5.5V, Min Supply Voltage (DC)=2V, Number of A/D Converters=1, Number of Bits=12, Number of Channels=4, Number of Converters=1, Number of Elements=1, Number of Inputs=4, Number of Pins=10, Packaging="Tape and Reel", Polarity=Bipolar, Power Dissipation=900uW, Radiation Hardening=No, REACH SVHC="No SVHC", Resolution=12b, Sampling Rate=3.3KS/s, Supply Type=Single, Termination=SMD/SMT, Width=3mm
U2: "No Description Available", Mfr_Name="Espressif Systems", Copyright="Copyright (C) 2023 Ultra Librarian. All rights reserved.", Manufacturer_Part_Number=ESP32-S3-WROOM-1U-N8R2, RefDes=RefDes, Type=Type
U3: library part CMP-005-000000-1, "Pressure Sensor 0.57PSI (3.92kPa) Differential Male - 0.13\" (3.3mm) Tube, Dual 0.6 V ~ 3 V 8-BSOP (0.475\", 12.06mm Width) Dual Ports, Same Side", Ambient Temperature Range High=+85°C, Ambient Temperature Range Low=0°C, Digikey Part Number=MP3V5004DP-ND, Manufacturer="Freescale Semiconductor", Max Supply Voltage=3.3V, Min Supply Voltage=2.7V, Mouser Part Number=841-MP3V5004DP, Operating Supply Current=10mA, Output Voltage=3V, Package=SOT1693-1, Temperature="0°C to +85°C", Temperature Range High=85°C, Accuracy=1.5%, Automotive=No, Category=IC, ComponentLink1Description=Upverter, ComponentLink1URL=https://upverter.com/part/id/b53385bc3ba3d6ea/, ComponentLink2Description=Datasheet, ComponentLink2URL=https://www.nxp.com/docs/en/data-sheet/MP3V5004G.pdf, Datasheet Path=datasheets/IC_Freescale_Semiconductor_MP3V5004DP_eec.pdf, Device Class L1=Sensors, Device Class L2="Pressure Sensors", Device Class L3=unset, Digikey Description="IC PRESSURE SENSOR 8-SOP", Footprint Url=https://www.nxp.com/docs/en/package-information/98ASA99255D.pdf, Height=0.39inch, helpURL=https://upverter.com/part/id/b53385bc3ba3d6ea/, Ipc Land Pattern Name=SOP254P1753X965-8, Lead Free=Yes, Mouser Description="Board Mount Pressure / Force Sensors SOP W/DUAL PORT 3V", Part Number=MP3V5004DP, Port Style=Barbed, RoHS=TRUE, Sensor Output="Analog Voltage", Standoff Height=0.002inch, Symbol Hash=4bc8a08c37d40424599bb33cee3b30e359dd3ad4e50bf560f40db3af4523a191, Temperature Range Low=0°C
U4: library part CMP-144026-000004-1, "AIR QUALITY GAS SENSOR FOR VOC'S"
U5: library part CMP-0253-00003-1, "Programmable Resolution Digital Thermometer, 1-Wire Interface, ±0.5°C Accuracy, 3-Pin TO92, -55°C to +125°C, Pb-Free", Code_JEDEC=TO-226-AA, ComponentLink1Description="Manufacturer URL", ComponentLink1URL=http://www.maxim-ic.com, ComponentLink2Description=Datasheet, ComponentLink2URL=http://datasheets.maxim-ic.com/en/ds/DS18B20.pdf, DatasheetVersion=2007, PackageDescription="TO-92 Package, Body Dia. 4.7mm; Leads 0.51 x 0.51 mm (max), Pb-Free", PackageReference=Q3+1, PackageVersion="revB, 2009"
U6: library part CMP-0254-00460-1, "I2C Real-Time Clock with 56-Byte NV RAM, 1.8V, 8-Pin uSOP, -40 to 85 degC", Code_JEDEC=MO-187-AA, ComponentLink1Description="Manufacturer URL", ComponentLink1URL=http://www.maxim-ic.com, ComponentLink2Description=Datasheet, ComponentLink2URL=http://datasheets.maxim-ic.com/en/ds/DS1338-DS1338Z.pdf, ComponentLink3Description="Package Specification", ComponentLink3URL=http://pdfserv.maxim-ic.com/package_dwgs/21-0036.PDF, DatasheetVersion=Mar-2012, PackageDescription="8-Pin Micro-MAX, Thin Shrink Small-Outline, 0.65 mm Pitch, uMAX, uSOP", PackageReference=U8-1, PackageVersion="revL, 2009"
U7: library part CMP-0069-00125-3, "SIMPLE SWITCHER® 3A Step-Down Voltage Regulator, 5-pin TO-263, Pb-Free", Manufacturer="Texas Instruments", PackageTopMarking="NSUZXYTTE#*LM2576S*-12 P+", PowerWise=N, Code_JEDEC=MO-169-AB, ComponentLink1Description="Datasheet URL", ComponentLink1URL=http://www.ti.com/general/docs/lit/getliterature.tsp?genericPartNumber=LM2576&fileType=pdf, CompType=Switcher, PackageDescription="TO-263, Molded, .400 x .390 x .180in, 5 Lead, .067in Pitch, Surface Mount", PackageReference=KTT0005B, PinCount=5, RoHS=Y
U8: library part CMP-0244-00109-1, "Fixed Low Drop Positive Voltage Regulator, 5V, 3-Pin DPAK, Tape and Reel", ComponentLink1Description="Manufacturer URL", ComponentLink1URL=http://www.st.com, ComponentLink2Description=Datasheet, ComponentLink2URL=http://www.st.com/internet/com/TECHNICAL_RESOURCES/TECHNICAL_LITERATURE/DATASHEET/CD00000544.pdf, DatasheetVersion=1/11/2011, PackageDescription="3-Pin Transistor Outline Package 2.28 mm Pitch, 9.7 mm Lead Span (DPAK)", PackageReference=TO-252, PackageVersion=2011
U9: "No Description Available", Mfr_Name="Texas Instruments", Copyright="Copyright (C) 2024 Ultra Librarian. All rights reserved.", Manufacturer_Part_Number=DRV8316CTRGFR, RefDes=RefDes, Type=DEV
U10: library part CMP-0244-00088-1, "Fixed Low Drop Positive Voltage Regulator, 3.3V, 3-Pin DPAK, Tape and Reel", ComponentLink1Description="Manufacturer URL", ComponentLink1URL=http://www.st.com, ComponentLink2Description=Datasheet, ComponentLink2URL=http://www.st.com/internet/com/TECHNICAL_RESOURCES/TECHNICAL_LITERATURE/DATASHEET/CD00000544.pdf, DatasheetVersion=1/11/2011, PackageDescription="3-Pin Transistor Outline Package 2.28 mm Pitch, 9.7 mm Lead Span (DPAK)", PackageReference=TO-252, PackageVersion=2011
U11: library part CMP-0244-00107-1, "Adjustable Low Drop Voltage Regulator, 1.25 to 15V, 3-Pin DPAK, Tape and Reel", ComponentLink1Description="Manufacturer URL", ComponentLink1URL=http://www.st.com, ComponentLink2Description=Datasheet, ComponentLink2URL=http://www.st.com/internet/com/TECHNICAL_RESOURCES/TECHNICAL_LITERATURE/DATASHEET/CD00000544.pdf, DatasheetVersion=1/11/2011, PackageDescription="3-Pin Transistor Outline Package 2.28 mm Pitch, 9.7 mm Lead Span (DPAK)", PackageReference=TO-252, PackageVersion=2011
X1: library part CMP-003-00022-2, "Low Profile Crystal, 32.768 kHz, +/- 20 ppm, 12.5 pF, -40 to 85 degC, 2-Pin SMD, Pb-Free, Tape and Reel", Case/Package=CSMD, Frequency=32.768kHz, Frequency Tolerance=20ppm, Load Capacitance=12.5pF, Manufacturer=Abracon, Max Operating Temperature=85°C, Min Operating Temperature=-40°C, Package Description="2-Pin Surface Mount Device, Body 3.2 x 1.5 mm", Package Quantity=3000, Package Reference=ABS07-2, Datasheet URL=http://www.abracon.com/Resonators/ABS07.pdf, Datasheet Version=Aug-15, ESR=70k, Manufacturer URL=http://www.abracon.com/, Mounting Technology=SM, Package URL=http://www.abracon.com/Support/PackageDrawing/Resonators/ABS07.PDF, Packaging=TapeandReel, Pins=2, RoHS Compliant=True, Tolerance=20ppm

## Nets (pads, with @x,y where several pads share a name; then routed paths per layer and width w, separated by ;. In a path a pad name is that pad's centre, name@x,y a point inside that pad or via, vN(x,y) a via of type N, cw(c..) or ccw(c..) an arc to the next point about the centre after c; other vN are vias at no path point)
3V: C6.1 C7.1 C22.1 R18.2 U3.2 U11.4
5V: C1.2 C16.1 P1.1 U8.4
12V: C12.1 C15.1 C17.1 C18.1 C20.1 C21.1 C23.1 L1.2 U7.4 U8.3 U10.3 U11.3
A1: C8.1 R2.2 U1.4
CLK: F6.2 J1.5 R10.2 U2.18
CMD: F5.2 J1.3 R9.2 U2.19
D+: R12.2 U2.14
D-: R11.2 U2.13
DT0: F4.2 J1.7 R8.2 U2.20
DT1: F3.2 J1.8 R7.2 U2.21
DT2: F2.2 J1.1 R6.2 U2.22
DT3: F1.2 J1.2 R5.2 U2.23
EN: C9.2 R1.2 SW1.3 SW1.4 U2.3
GND: C1.1 C2.2 C3.2 C4.2 C5.2 C6.2 C7.2 C8.2 C9.1 C10.2 C11.2 C12.2 C13.2 C14.1 C15.2 C16.2 C17.2 C18.2 C19.2 C20.2 C21.2 C22.2 C23.2 D1.1 DS1.2 F1.1 F2.1 F3.1 F4.1 F5.1 F6.1 J1.6 J1.11 J1.12 J1.13 J1.14 J2.3 J3.2 P1.2 P1.MP1 P1.MP2 Q2.2 R17.2 R19.2 SW1.1 SW1.2 U1.1 U1.3 U2.1 U2.40 U2.41 U2.42 U2.43 U2.44 U2.45 U2.46 U2.47 U2.48 U2.49 U3.3 U6.4 U7.3 U7.5 U7.6 U8.1 U10.1
INLA: C2.1 C3.1 C4.1 C5.1 C10.1 C11.1 C19.1 J1.4 R1.1 R3.1 R4.1 R5.1 R6.1 R7.1 R8.1 R9.1 R10.1 U1.8 U2.2 U6.8 U9.28 U9.30 U9.32 U10.4
LCD_RX: P1.3 U2.10
LCD_TX: P1.4 U2.11
NetC13_1: C13.1 Q1.2 R13.1
NetD1_2: D1.2 L1.1 U7.2
NetDS1_1: DS1.1 R14.2
NetJ2_1: J2.1 R11.1
NetJ2_2: J2.2 R12.1
NetQ1_1: Q1.1 R15.2
NetQ1_3: Q1.3 R14.1
NetQ2_1: Q2.1 R16.2
NetQ2_3: Q2.3 R13.2 R15.1
NetR2_1: R2.1 U3.4
NetR16_1: R16.1 R17.1
NetR18_1: R18.1 R19.1 U11.1
NetU6_1: U6.1 X1.2
NetU6_2: U6.2 X1.1
PWMA: U2.34 U9.27
PWMB: U2.33 U9.29
PWMC: U2.32 U9.31
RDY: U1.2 U2.35
SCL: R3.2 U1.10 U2.39 U4.6 U6.6
SDA: R4.2 U1.9 U2.38 U4.3 U6.5
VIN: C14.2 J3.1 U7.1
pads on no net: J1.9 J1.10 P1.5 P1.6 U1.5 U1.6 U1.7 U2.4 U2.5 U2.6 U2.7 U2.8 U2.9 U2.12 U2.15 U2.16 U2.17 U2.24 U2.25 U2.26 U2.27 U2.28 U2.29 U2.30 U2.31 U2.36 U2.37 U3.1 U3.5 U3.6 U3.7 U3.8 U4.1 U4.2 U4.4 U4.5 U4.7 U5.1 U5.2 U5.3 U6.3 U6.7 U9.1 U9.2 U9.3 U9.4 U9.5 U9.6 U9.7 U9.8 U9.9 U9.10 U9.11 U9.12 U9.13 U9.14 U9.15 U9.16 U9.17 U9.18 U9.19 U9.20 U9.21 U9.22 U9.23 U9.24 U9.25 U9.26 U9.33 U9.34 U9.35 U9.36 U9.37 U9.38 U9.39 U9.40 U9.41

## Silkscreen, mask and mechanical layers (free items; w line width, h text height)
Mechanical 1:
  circle w0.254: c75.946,76.327 r50.038

## Text inside footprints (layer, text, board x,y; h text height)
U2: Top Overlay "*" at 64.834,44.171 h1.27; Top Assembly "*" at 67.602,44.171 h1.27
U9: Top Overlay "*" at 204.343,66.755 h1.27; Top Assembly "*" at 205.791,66.755 h1.27